# Altium PCB PCB1-unroute.PcbDoc
Units mm, origin at the board's own origin, x right, y up, seen from the top; angles counter-clockwise.
Board outline 94.61 x 65.91 mm, 2 copper layers (Top Layer, Bottom Layer); 34 components, 30 nets, 89 pads, 2 vias.
Unrouted connection lines stored in the file: 58.
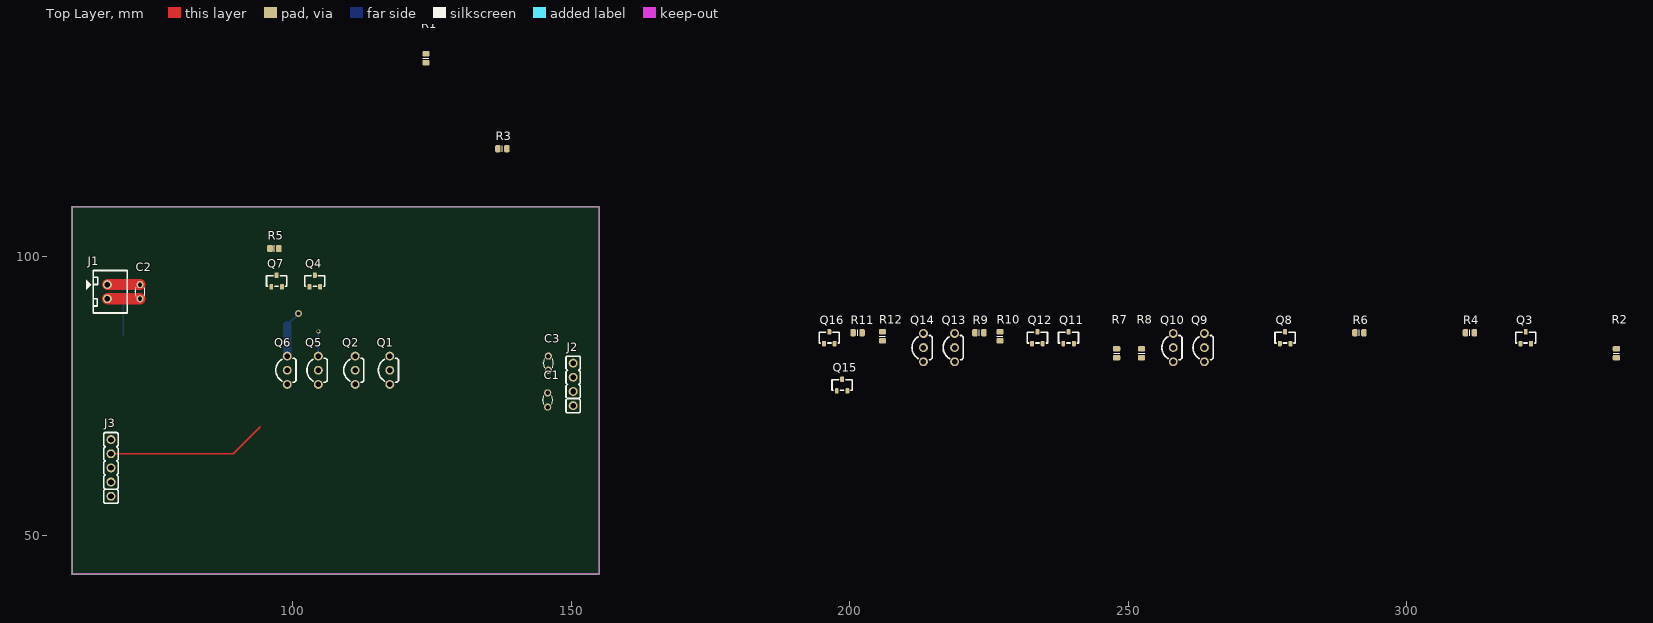
[diagram p0: Top Layer view]
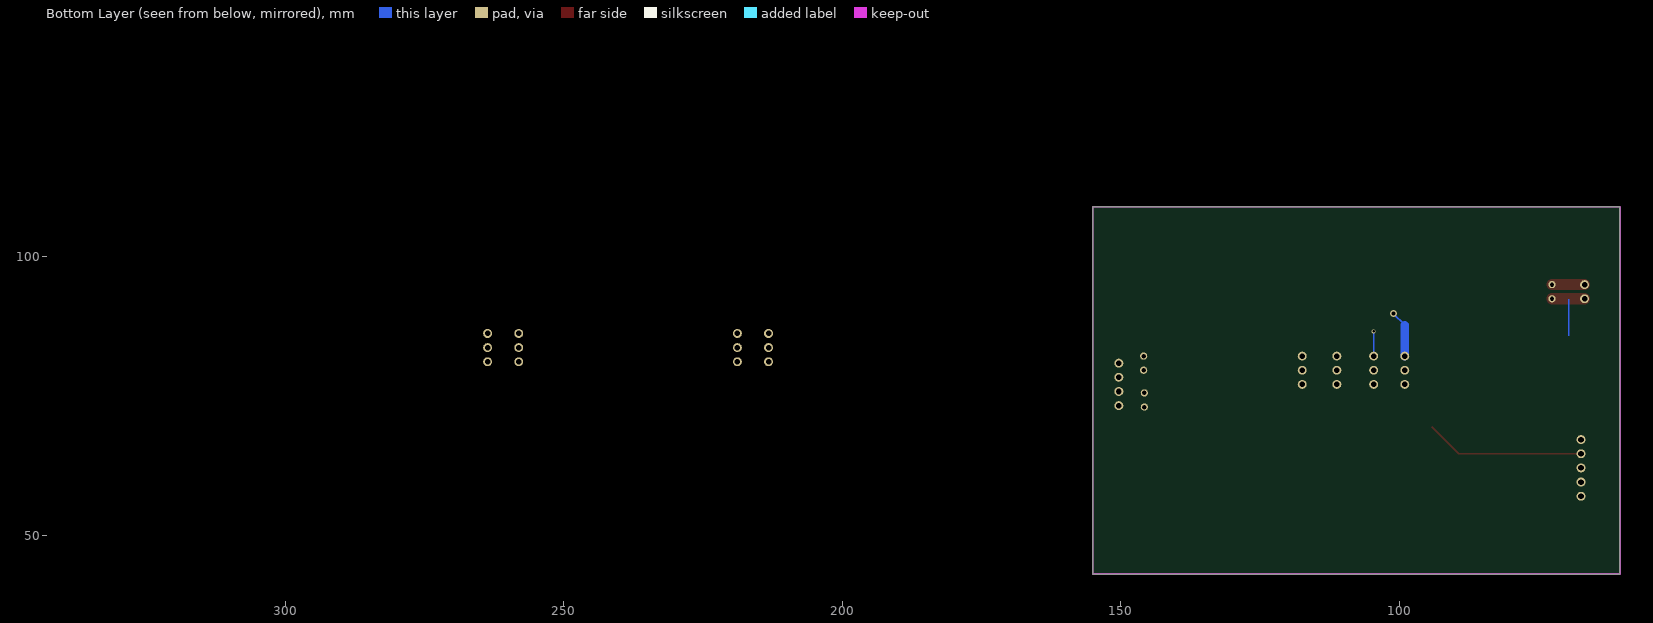
[diagram p1: Bottom Layer view, seen from below]

## Layer stack, top to bottom
Top Solder: solder mask 0.0102, Solder Resist, Dk 3.5
Top Layer: signal copper 0.0356
Dielectric 1: dielectric 0.32, FR-4, Dk 4.8
Bottom Layer: signal copper 0.0356
Bottom Solder: solder mask 0.0102, Solder Resist, Dk 3.5

## Board outline
60.452,43.053 60.452,108.966 155.067,108.966 155.067,43.053

## Design rules (kind name [scope] priority, off if disabled: settings)
Clearance [All] p1: gap=0.254 ignorepadtopadclearanceinfootprint=FALSE except(0: Arc-Hole Track-Hole SMDPad-Hole THPad-Hole Via-Hole Fill-Hole Poly-Hole Region-Hole Text-Hole)
PolygonConnect [All] p1: connectstyle=Relief reliefconductorwidth=0.254 reliefentries=4 polygonreliefangle="90 Angle" airgapwidth=0.254
RoutingVias [All] p1: holewidth=0.4 width=0.7 viastyle="Through Hole" minholewidth=0.4 minwidth=0.7 maxholewidth=0.4 maxwidth=0.7
SolderMaskExpansion [All] p1: expansion=0.102
Width [All] p1: maxlimit=2 minlimit=0.2 preferedwidth=0.2
30 further rules are at their usual default settings.

## Components (designator, comment, footprint, x,y, rotation, side; value= is the part's Value field where it differs from the comment)
C1 "5WF104MABAA" C0_1uF 145.796,74.295 r90 top value="0.1uF, 25V"
C2 "5WF104MABAA" C0_1uF 72.644,93.726 r90 top value="0.1uF, 25V"
C3 "5WF104MABAA" C0_1uF 145.923,80.899 r90 top value="0.1uF, 25V"
J1 "OSTTC-02-2162" CON2 66.802,93.726 r270 top value="5 - 12VDC"
J2 "2012-254-1x04-SG" Header_4 150.368,77.089 r90 top value=Motor
J3 "2012-254-1x05-SG" Header_5 67.437,62.103 r90 top value=Controller
Q1 "SS8550" SS8550 117.475,79.629 r90 top
Q2 "SS8550" SS8550 111.252,79.629 r90 top
Q3 "2SC1815-HF" 2SC1815-HF 321.31,85.471 r0 top
Q4 "2SC1815-HF" 2SC1815-HF 104.013,95.631 r0 top
Q5 "SS8050" SS8050 104.648,79.629 r90 top
Q6 "SS8050" SS8050 99.06,79.629 r90 top
Q7 "2SC1815-HF" 2SC1815-HF 97.155,95.631 r0 top
Q8 "2SC1815-HF" 2SC1815-HF 278.13,85.471 r0 top
Q9 "SS8550" SS8550 263.652,83.693 r90 top
Q10 "SS8550" SS8550 258.064,83.693 r90 top
Q11 "2SC1815-HF" 2SC1815-HF 239.268,85.471 r0 top
Q12 "2SC1815-HF" 2SC1815-HF 233.68,85.471 r0 top
Q13 "SS8050" SS8050 218.821,83.693 r90 top
Q14 "SS8050" SS8050 213.233,83.693 r90 top
Q15 "2SC1815-HF" 2SC1815-HF 198.628,76.962 r0 top
Q16 "2SC1815-HF" 2SC1815-HF 196.342,85.471 r0 top
R1 "CF1/4W220RJ25" RESC2012L 123.952,135.636 r90 top value="220R, 1/4W"
R2 "CF1/4W220RJ25" RESC2012L 337.566,82.677 r90 top value="220R, 1/4W"
R3 "CR05JL7-2K2" RESC2012L 137.668,119.38 r0 top value="2K2, 1/8W"
R4 "CR05JL7-2K2" RESC2012L 311.277,86.36 r0 top value="2K2, 1/8W"
R5 "CR05JL7-2K2" RESC2012L 96.774,101.473 r0 top value="2K2, 1/8W"
R6 "CR05JL7-2K2" RESC2012L 291.465,86.36 r0 top value="2K2, 1/8W"
R7 "CF1/4W220RJ25" RESC2012L 247.904,82.677 r90 top value="220R, 1/4W"
R8 "CF1/4W220RJ25" RESC2012L 252.349,82.677 r90 top value="220R, 1/4W"
R9 "CR05JL7-2K2" RESC2012L 223.266,86.36 r0 top value="2K2, 1/8W"
R10 "CR05JL7-2K2" RESC2012L 226.949,85.725 r90 top value="2K2, 1/8W"
R11 "CR05JL7-2K2" RESC2012L 201.422,86.36 r0 top value="2K2, 1/8W"
R12 "CR05JL7-2K2" RESC2012L 205.867,85.725 r90 top value="2K2, 1/8W"

## Footprints (in the part's own frame and the unit in brackets; to place one, negate y for a bottom-side part, rotate by r counter-clockwise, add the part's x,y. Pads: shape width x height; smd on the part's side, far side on the other; paste and mask are expansions set on the pad)
2SC1815-HF [mm] "SOT23-3"
  rrect50% 0.7x1 smd: 1(-0.95,-1.05) 2(0.95,-1.05) 3(0,1.05)
  silkscreen extent -1.8,-0.95 1.8,0.95, body extent -1.5,-1.32 1.5,1.32, height 1.08
C0_1uF [mm] "Tu gom 3.5wf104mabaa 05 x 1.78 x 3.43 mm (WxTxH max); Pin Spacing 2.54 mm (typ)"
  round 1.3 hole 0.8: 1(-1.27,0) 2(1.27,0)
  silkscreen extent -0.8,-0.89 0.8,0.89, body extent -2.92,-0.85 2.92,0.85, height 6.42
CON2 [mm] "CON2"
  round 1.6 hole 1 mask+0.1: 1(-1.27,0) 2(1.27,0)
  silkscreen extent -3.81,-3.8 3.81,3.56, body extent -3.75,-2.29 3.75,3.41, height 7
Header_4 [mm] "Connector DIP, 4Pin_2.54mm"
  round 1.6 hole 1 mask+0.1: 1(-3.81,0) 2(-1.27,0) 3(1.27,0) 4(3.81,0)
  silkscreen extent -5.08,-1.28 5.08,1.28, body extent -5.08,-1.27 5.08,1.27, height 10.1
Header_5 [mm] "Connector DIP, 5Pin_2.54mm"
  round 1.6 hole 1 mask+0.1: 1(-5.08,0) 2(-2.54,0) 3(0,0) 4(2.54,0) 5(5.08,0)
  silkscreen extent -6.35,-1.28 6.35,1.28, body extent -6.35,-1.27 6.35,1.27, height 10.1
RESC2012L [mm] "Chip Resistor, Body 2.0x1.3mm, IPC High Density"
  rrect50% 1x1.3 smd: 1(-0.8,0) 2(0.8,0)
  silkscreen extent 0,-0.55 0,0.55, body extent -1,-0.63 1,0.63, height 0.6
SS8050 [mm] "TO-92 Bent Lead, Flat Index; 3 In-Line, Axial Leads; Body Dia. 4.5mm; Leads 0.51 x 0.48 mm (max)"
  round 1.6 hole 1 mask+0.1: 1(-2.54,0) 2(0,0) 3(2.54,0)
  silkscreen extent -2.16,-1.57 2.16,2.05, body extent -2.79,-1.59 2.79,2.61, height 10
SS8550 [mm] "TO-92 Bent Lead, Flat Index; 3 In-Line, Axial Leads; Body Dia. 4.5mm; Leads 0.51 x 0.48 mm (max)"
  round 1.6 hole 1 mask+0.1: 1(-2.54,0) 2(0,0) 3(2.54,0)
  silkscreen extent -2.16,-1.57 2.16,2.05, body extent -2.79,-1.59 2.79,2.61, height 10

## Part data
C1 C2 C3: "CAP Y5P CAPNTO 0.1uF 25V 20%", ComponentLink1Description=Datasheet, ComponentLink1URL="D:\Dropbox\Datasheets\Passive Components\Capacitors\AVX Disc Ceramic Capacitors.pdf", Unit Price=0.003
J1: "Terminal Block 2 Poles 5.08mm Blue", ComponentLink1Description=Datasheet, ComponentLink1URL="D:\Dropbox\Datasheets\Passive Components\Connectors\OSTTC-XX-2162.pdf", Unit Price=0.076
J2: "Male Header 04 Pin 2.54mm Straight", ComponentLink1Description=Datasheet, ComponentLink1URL="D:\Dropbox\Datasheets\Passive Components\Connectors\2012-254-1xXX-SG.pdf", Unit Price=0.032
J3: "Male Header 05 Pin 2.54mm Straight", ComponentLink1Description=Datasheet, ComponentLink1URL="D:\Dropbox\Datasheets\Passive Components\Connectors\2012-254-1xXX-SG.pdf", Unit Price=0.032
Q1 Q2 Q9 Q10: "Trans PNP -25V -1.5A TO-92", ComponentLink1Description=Datasheet, ComponentLink1URL="D:\Dropbox\Datasheets\Transistors\N Channel Bipolar\SS8550.pdf", Unit Price=0.0476
Q3 Q4 Q7 Q8 Q11 Q12 Q15 Q16: "Trans NPN 50V 150mA SOT-23", ComponentLink1Description=Datasheet, ComponentLink1URL="D:\Dropbox\Datasheets\Transistors\P Channel Bipolar\2SC1815-HF.pdf", Unit Price=0.0286
Q5 Q6 Q13 Q14: "Trans NPN 25V 1.5A TO-92", ComponentLink1Description=Datasheet, ComponentLink1URL="D:\Dropbox\Datasheets\Transistors\P Channel Bipolar\SS8050.pdf", Unit Price=0.0476
R1 R2 R7 R8: "RES CF AXIAL-0.3 5% 1/4W 220R", ComponentLink1Description=Datasheet, ComponentLink1URL="D:\Dropbox\Datasheets\Passive Components\Resistors\Carbon Film Resistor.pdf", Unit Price=0.001
R3 R4 R5 R6 R9 R10 R11 R12: "RES CR 0805 5% 1/8W 2K2", ComponentLink1Description=Datasheet, ComponentLink1URL="D:\Dropbox\Datasheets\Passive Components\Resistors\Thick Film Chip Resistor CR.pdf", Unit Price=0.000802

## Via types
v1: diameter 0.7, hole 0.4, Top Layer to Bottom Layer, 1 vias
v2: diameter 1.27, hole 0.711, Top Layer to Bottom Layer, 1 vias

## Nets (pads, with @x,y where several pads share a name; then routed paths per layer and width w, separated by ;. In a path a pad name is that pad's centre, name@x,y a point inside that pad or via, vN(x,y) a via of type N, cw(c..) or ccw(c..) an arc to the next point about the centre after c; other vN are vias at no path point)
GND: C2.1 J1.2 J3.5 Q5.1 Q6.1 Q7.2 Q8.2 Q13.1 Q14.1 Q15.2 Q16.2 | length 5.8
  Top Layer w2: J1.2 C2.1
IN_A: J3.1 R3.1 R6.2
IN_B: J3.2 R4.2 R5.1
IN_C: J3.3 R9.1 R12.2
IN_D: J3.4 R10.2 R11.1 | length 28.8
  Top Layer w0.254: J3.4 89.408,64.643 94.234,69.469
M_A: C1.1 J2.1 Q2.3 Q6.3 | length 8.5
  Bottom Layer w0.254: 99.06,87.757 v2(101.092,89.789)
  Bottom Layer w1.5: Q6.3 99.06,87.757
M_B: C1.2 J2.2 Q1.3 Q5.3 | length 4.4
  Bottom Layer w0.254: Q5.3 v1(104.648,86.614)
M_C: C3.1 J2.3 Q10.3 Q14.3
M_D: C3.2 J2.4 Q9.3 Q13.3
NetQ1_2: Q1.2 R2.2
NetQ2_2: Q2.2 R1.2
NetQ3_1: Q3.1 Q8.3 R4.1
NetQ3_3: Q3.3 R2.1
NetQ4_1: Q4.1 Q7.3 R3.2
NetQ4_3: Q4.3 R1.1
NetQ7_1: Q7.1 R5.2
NetQ8_1: Q8.1 R6.1
NetQ9_2: Q9.2 R8.2
NetQ10_2: Q10.2 R7.2
NetQ11_1: Q11.1 Q16.3 R10.1
NetQ11_3: Q11.3 R8.1
NetQ12_1: Q12.1 Q15.3 R9.2
NetQ12_3: Q12.3 R7.1
NetQ15_1: Q15.1 R11.2
NetQ16_1: Q16.1 R12.1
TA: Q4.2 Q5.2
TB: Q3.2 Q6.2
TC: Q12.2 Q13.2
TD: Q11.2 Q14.2
VCC: C2.2 J1.1 Q1.1 Q2.1 Q9.1 Q10.1 | length 12.3
  Top Layer w2: J1.1 C2.2
  Bottom Layer w0.254: 69.596,85.852 69.596,92.329

## Keep-outs
Keep-Out Layer:
  the board outline again, w0.3

## Text inside footprints (layer, text, board x,y; h text height)
J1: Mechanical 2 "2" at 66.302,92.726 h1 r270; Mechanical 2 "1" at 66.302,95.126 h1 r270
J2: Mechanical 2 "1" at 150.622,73.025 h1.2 r90; Mechanical 2 "4" at 150.622,80.645 h1.2 r90
J3: Mechanical 2 "5" at 67.691,66.929 h1.2 r90; Mechanical 2 "1" at 67.691,56.769 h1.2 r90
Q1: Mechanical 1 "C" at 117.856,81.915 h0.8 r90; Mechanical 1 "B" at 117.856,79.375 h0.8 r90; Mechanical 1 "E" at 117.856,76.835 h0.8 r90
Q2: Mechanical 1 "C" at 111.633,81.915 h0.8 r90; Mechanical 1 "B" at 111.633,79.375 h0.8 r90; Mechanical 1 "E" at 111.633,76.835 h0.8 r90
Q3: Mechanical 2 "C" at 321.16,85.771 h0.5; Mechanical 2 "E" at 322.07,84.616 h0.5; Mechanical 2 "B" at 320.17,84.616 h0.5
Q4: Mechanical 2 "C" at 103.863,95.931 h0.5; Mechanical 2 "E" at 104.773,94.776 h0.5; Mechanical 2 "B" at 102.873,94.776 h0.5
Q5: Mechanical 1 "E" at 105.029,76.835 h0.8 r90; Mechanical 1 "B" at 105.029,79.375 h0.8 r90; Mechanical 1 "C" at 105.029,81.915 h0.8 r90
Q6: Mechanical 1 "E" at 99.441,76.835 h0.8 r90; Mechanical 1 "B" at 99.441,79.375 h0.8 r90; Mechanical 1 "C" at 99.441,81.915 h0.8 r90
Q7: Mechanical 2 "C" at 97.005,95.931 h0.5; Mechanical 2 "E" at 97.915,94.776 h0.5; Mechanical 2 "B" at 96.015,94.776 h0.5
Q8: Mechanical 2 "C" at 277.98,85.771 h0.5; Mechanical 2 "E" at 278.89,84.616 h0.5; Mechanical 2 "B" at 276.99,84.616 h0.5
Q9: Mechanical 1 "C" at 264.033,85.979 h0.8 r90; Mechanical 1 "B" at 264.033,83.439 h0.8 r90; Mechanical 1 "E" at 264.033,80.899 h0.8 r90
Q10: Mechanical 1 "C" at 258.445,85.979 h0.8 r90; Mechanical 1 "B" at 258.445,83.439 h0.8 r90; Mechanical 1 "E" at 258.445,80.899 h0.8 r90
Q11: Mechanical 2 "C" at 239.118,85.771 h0.5; Mechanical 2 "E" at 240.028,84.616 h0.5; Mechanical 2 "B" at 238.128,84.616 h0.5
Q12: Mechanical 2 "C" at 233.53,85.771 h0.5; Mechanical 2 "E" at 234.44,84.616 h0.5; Mechanical 2 "B" at 232.54,84.616 h0.5
Q13: Mechanical 1 "E" at 219.202,80.899 h0.8 r90; Mechanical 1 "B" at 219.202,83.439 h0.8 r90; Mechanical 1 "C" at 219.202,85.979 h0.8 r90
Q14: Mechanical 1 "E" at 213.614,80.899 h0.8 r90; Mechanical 1 "B" at 213.614,83.439 h0.8 r90; Mechanical 1 "C" at 213.614,85.979 h0.8 r90
Q15: Mechanical 2 "C" at 198.478,77.262 h0.5; Mechanical 2 "E" at 199.388,76.107 h0.5; Mechanical 2 "B" at 197.488,76.107 h0.5
Q16: Mechanical 2 "C" at 196.192,85.771 h0.5; Mechanical 2 "E" at 197.102,84.616 h0.5; Mechanical 2 "B" at 195.202,84.616 h0.5